# Altium PCB SmartMCUPCB.PcbDoc
Units mil, origin at the board's own origin, x right, y up, seen from the top; angles counter-clockwise.
Board outline 4080 x 2385 mil, 2 copper layers (Top Layer, Bottom Layer); 5 components, 3 nets, 12 pads, 0 vias.
Unrouted connection lines stored in the file: 2.
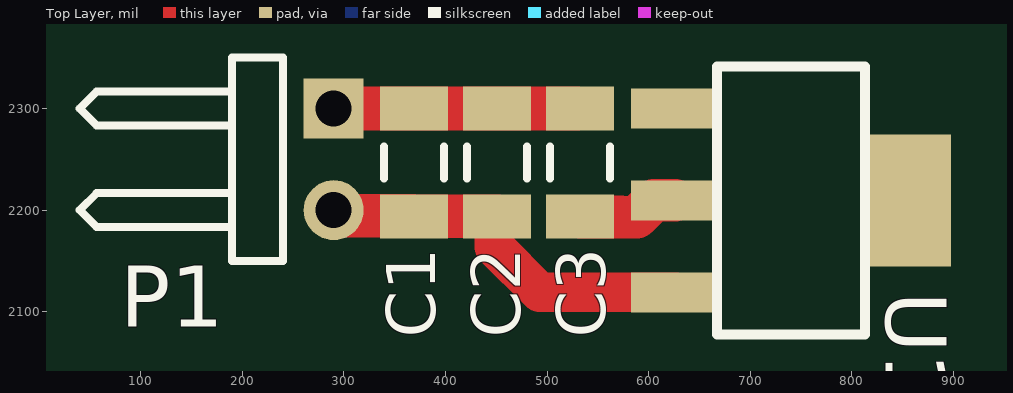
[diagram p0: Top Layer view]
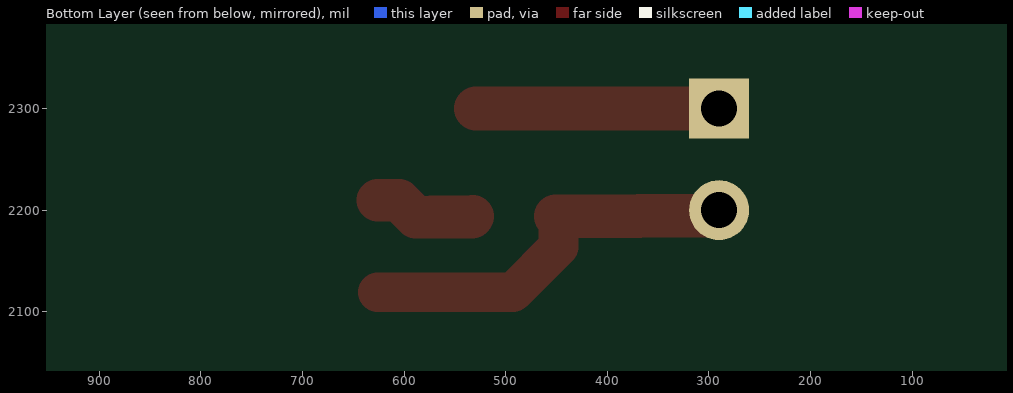
[diagram p1: Bottom Layer view, seen from below]

## Layer stack, top to bottom
Top Solder: solder mask 0.4, Solder Resist, Dk 3.5
Top Layer: signal copper 1.4
Dielectric 1: dielectric 12.6, FR-4, Dk 4.8
Bottom Layer: signal copper 1.4
Bottom Solder: solder mask 0.4, Solder Resist, Dk 3.5

## Board outline
0,0 0,2385 4080,2385 4080,0

## Design rules (kind name [scope] priority, off if disabled: settings)
Clearance [All] p1: gap=10 ignorepadtopadclearanceinfootprint=FALSE
PolygonConnect [All] p1: connectstyle=Relief reliefconductorwidth=10 reliefentries=4 polygonreliefangle="90 Angle" airgapwidth=10
RoutingVias [All] p1: holewidth=28 width=50 viastyle="Through Hole" minholewidth=28 minwidth=50 maxholewidth=28 maxwidth=50
SolderMaskExpansion [All] p1: expansion=4 istentingtop=FALSE
SupplyNets "Schematic Supply Nets_2" [InNet('+3.3V')] p1: voltage=0.000
SupplyNets "Schematic Supply Nets_1" [InNet('+5V')] p2: voltage=0.000
SupplyNets "Schematic Supply Nets" [InNet('GND')] p3: voltage=0.000
Width [All] p1: maxlimit=43 minlimit=10 preferedwidth=10
30 further rules are at their usual default settings.

## Components (designator, comment, footprint, x,y, rotation, side; value= is the part's Value field where it differs from the comment)
C1 "Cap Semi" C1206 369,2247 r270 top value=100nF
C2 "Tantalum Cap" C1206 450.74,2247 r270 top value=10uF
C3 "Tantalum Cap" C1206 532.48,2247 r270 top value=10uF
P1 "Battery" HDR1X2H 290,2300 r270 top
U1 "Low-Dropout Linear Regulator" "4-Pin SOT" 740.16,2077.71 r270 top

## Footprints (in the part's own frame and the unit in brackets; to place one, negate y for a bottom-side part, rotate by r counter-clockwise, add the part's x,y. Pads: shape width x height; smd on the part's side, far side on the other; paste and mask are expansions set on the pad)
"4-Pin SOT" [mm]
  rect 1x2.2 smd: 0(-1.05,-2.9) 1(-5.65,-2.9) 2(-3.35,-2.9)
  rect 3.3x2.2 smd: 2(-3.35,2.9)
  silkscreen extent -6.7,-1.85 0,1.85
C1206 [mm] "Chip Capacitor, Body 3.2x1.6mm, IPC High Density"
  rect 1.1x1.7 smd: 1(-1.35,0) 2(1.35,0)
  silkscreen extent -0.4,-0.75 0.4,0.75, body extent -1.7,-0.9 1.7,0.9, height 1.3
HDR1X2H [mm] "Connector; Header; 2 Position; Right Angle"
  rect 1.5x1.5 hole 0.9: 1(0,0)
  round 1.5 hole 0.9: 2(2.54,0)
  silkscreen extent -1.27,-6.35 3.81,-1.27

## Part data
C1: "Capacitor (Semiconductor SIM Model)", LatestRevisionDate=29-May-2009, LatestRevisionNote="IPC-7351 Footprint Added.", PackageDescription="Chip Capacitor", PackageReference=C1206, Published=8-Jun-2000, Publisher="Altium Limited"
C2 C3: library part "Cap Semi", "Capacitor (Semiconductor SIM Model)", LatestRevisionDate=29-May-2009, LatestRevisionNote="IPC-7351 Footprint Added.", PackageDescription="Chip Capacitor", PackageReference=C1206, Published=8-Jun-2000, Publisher="Altium Limited"
P1: library part "Header 2H", "Header, 2-Pin, Right Angle", Voltage=9V, LatestRevisionDate=17-Jul-2002, LatestRevisionNote="Re-released for DXP Platform.", Publisher="Altium Limited"
U1: library part lm1117, "The LM1117 is a low dropout voltage regulator with a  / dropout of 1.2 V at 800 mA of load current. /  The LM1117 is available in an adjustable version,  / which can set the output voltage from 1.25 V to 13.8 V  / with only two external resistors. In addition, the device  / is available in five fixed voltages, 1.8 V, 2.5 V, 3.3 V,  / and 5 V. /  The LM1117 offers current limiting and thermal  / shutdown. The circuit includes a Zener trimmed band / gap reference to assure output voltage accuracy to  / within ±1%. /  A minimum of 10-µF tantalum capacitor is required  / at the output to improve the transient response and  / stability.", Output Voltage=3.3V, ComponentLink1Description=Datasheet, ComponentLink1URL=https://www.ti.com/lit/ds/symlink/lm1117.pdf

## Nets (pads, with @x,y where several pads share a name; then routed paths per layer and width w, separated by ;. In a path a pad name is that pad's centre, name@x,y a point inside that pad or via, vN(x,y) a via of type N, cw(c..) or ccw(c..) an arc to the next point about the centre after c; other vN are vias at no path point)
+3.3V: C3.2 U1.2 | length 100.7
  Top Layer w42: C3.2 533.13,2193.2 572.8,2193.2 573,2193 588.39,2193 604.99,2209.6 U1.2@625.98,2209.6
+5V: C1.2 C2.2 P1.2 U1.0 | length 390.9
  Top Layer w33: C2.2@448,2191.11 C2.2
  Top Layer w39: C2.2@448,2191.11 448,2164 492.95,2119.05 U1.0
  Top Layer w42: P1.2 294.62,2200 P1.2@300.11,2194.5 ; C1.2@368.35,2194.5 C1.2
  Top Layer w43: P1.2@300.11,2194.5 C1.2@368.35,2194.5 ; C1.2 C2.2
GND: C1.1 C2.1 C3.1 P1.1 U1.1 | length 243.8
  Top Layer w10: C3.1@529.33,2300 C3.1@532.48,2303.15
  Top Layer w43: P1.1 C3.1@529.33,2300